# Altium PCB MainBoard.PcbDoc (part 2 of 2)
Units mm, origin at the board's own origin, x right, y up, seen from the top; angles counter-clockwise.
Board outline 48 x 51 mm, 4 copper layers (Component Side, Ground Plane, Power Plane, Solder Side), stack 0.844 mm thick; 73 components, 157 nets, 519 pads, 251 vias.
Unrouted connection lines stored in the file: 2.
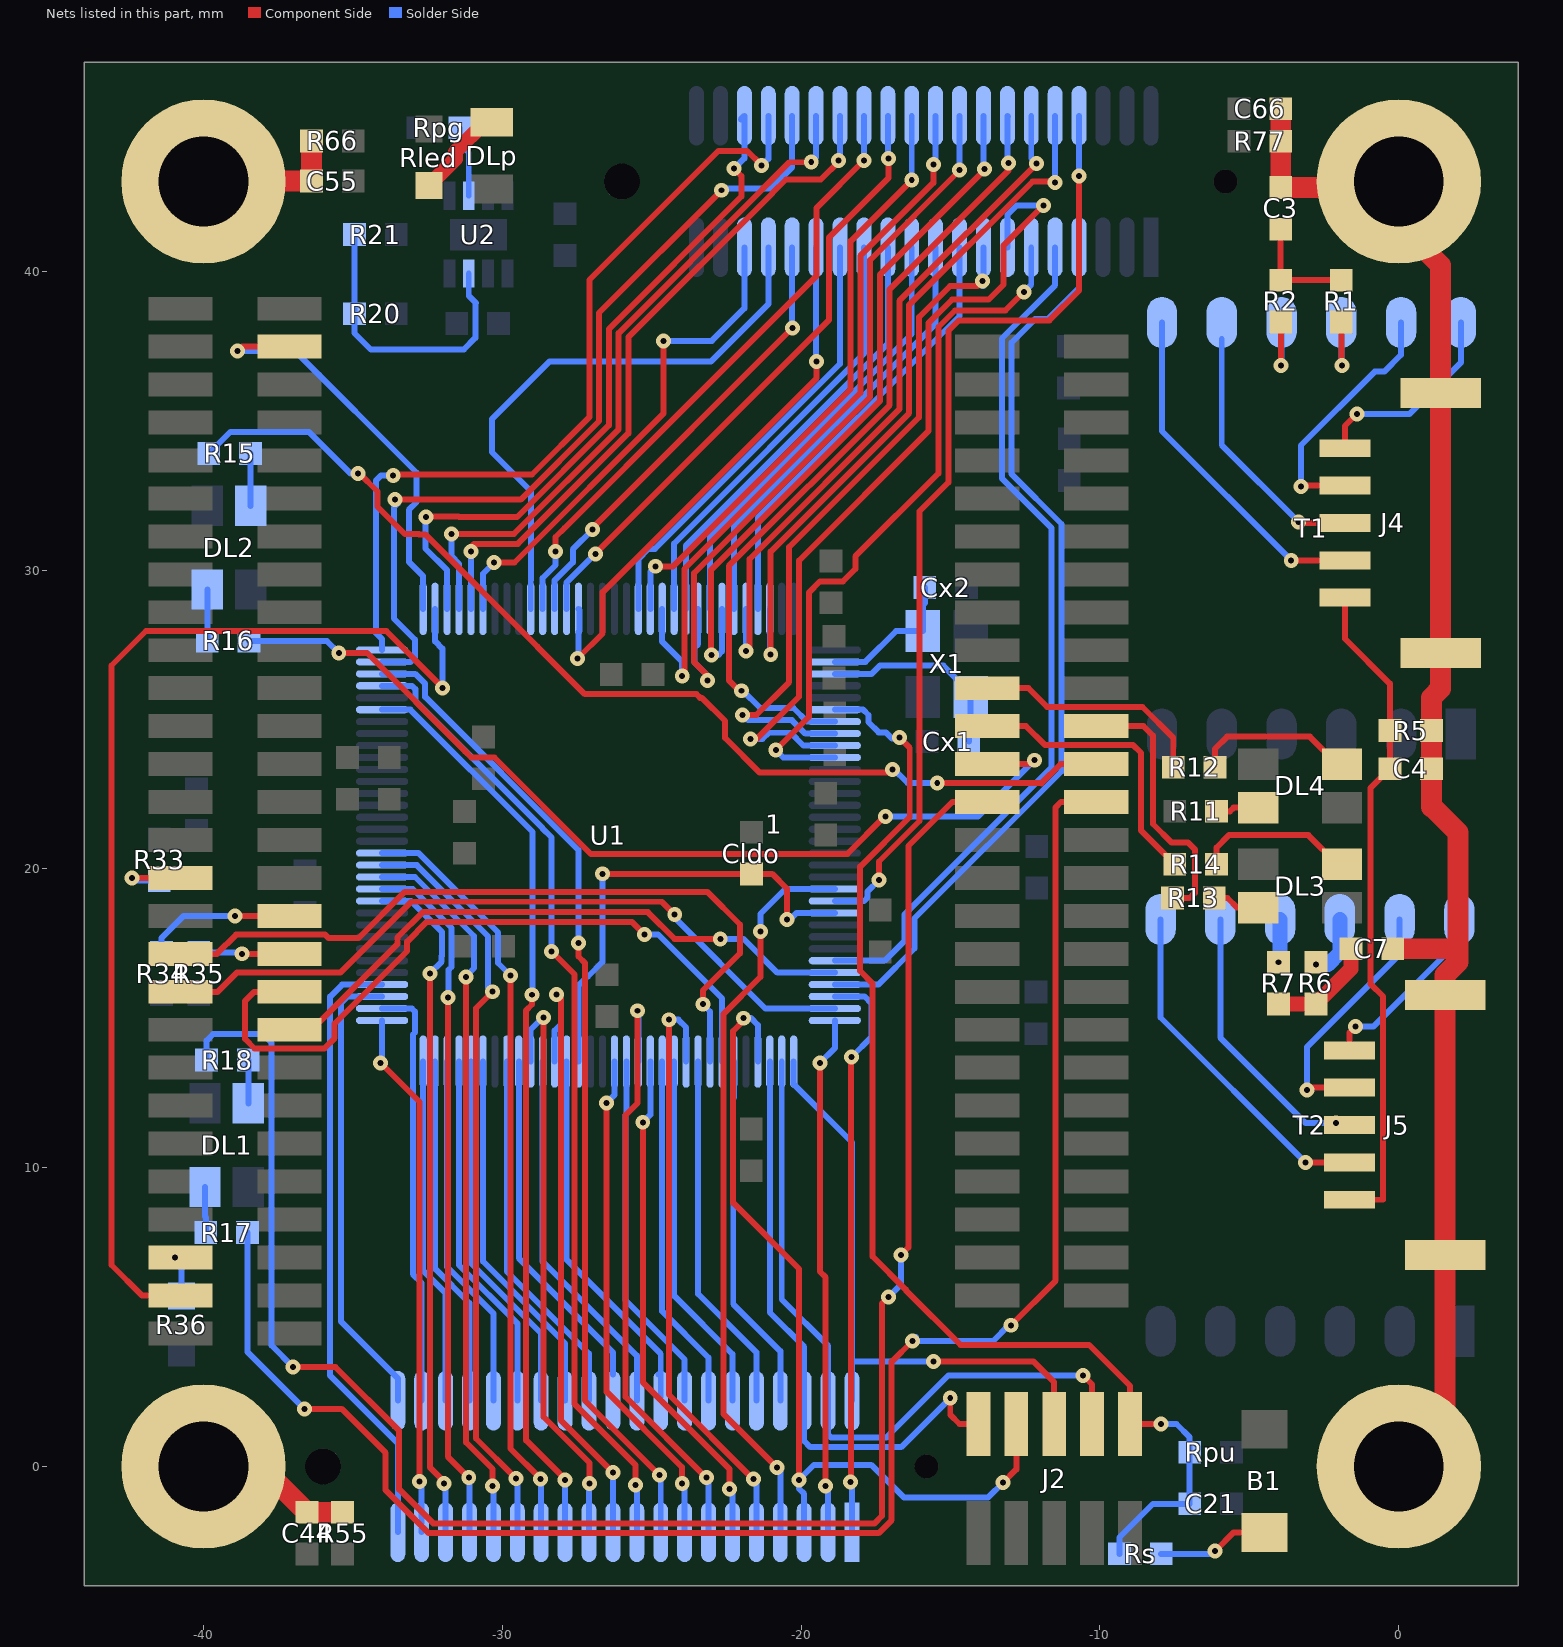
[diagram p4: the nets of this part, all layers, seen from the top]

## Via types
v1: diameter 0.5, hole 0.2, Component Side to Solder Side, 226 vias
v2: diameter 0.5, hole 0.15, Component Side to Solder Side, 25 vias

## Nets (pads, with @x,y where several pads share a name; then routed paths per layer and width w, separated by ;. In a path a pad name is that pad's centre, name@x,y a point inside that pad or via, vN(x,y) a via of type N, cw(c..) or ccw(c..) an arc to the next point about the centre after c; other vN are vias at no path point) (continued)
Net_20: ?.20 R12.2 | length 8.1
  Component Side w0.2: ?.20@-13.775,26.044 -12.394,26.044 -11.767,25.417 -8.577,25.417 -7.549,24.389 R12.2@-7.549,23.55 ; R12.2@-7.549,23.4 R12.2@-7.549,23.55 ; R12.2@-7.399,23.4 R12.2@-7.549,23.55
Net_21: ?.21 R13.2 | length 9
  Component Side w0.2: ?.21@-10.125,24.774 -8.544,24.774 -8.225,24.456 -8.225,21.5 -7.6,20.875 -7.05,20.875 -6.825,20.65 -6.825,19.198 -6.998,19.025 R13.2@-7.574,19.025
Net_22: ?.22 R14.2 | length 9.7
  Component Side w0.2: ?.22@-13.775,24.774 -12.474,24.774 -11.847,24.147 -8.897,24.147 -8.625,23.875 -8.625,21.277 R14.2@-7.499,20.15
Net_23: ?.23 R15.2 | length 35.9
  Component Side w0.2: v1(-34.826,33.235) -34.785,33.235 -34.179,32.629 -34.179,32.121 -33.259,31.201 -32.794,31.201 -32.79,31.196 -32.584,31.196 -28.829,27.441 -28.829,27.435 -27.237,25.844 -23.503,25.844 -23.382,25.722 -23.322,25.722 -22.546,24.946 -22.546,24.377 -21.387,23.218 -17.056,23.218 v1(-16.945,23.329) ; v1(-15.446,22.872) -11.974,22.872 -11.964,22.861 -11.321,23.504 ?.23@-10.125,23.504
  Solder Side w0.2: R15.2@-39.824,33.9 -39.099,34.625 -36.475,34.625 -35.075,33.225 -35.065,33.235 v1(-34.826,33.235) ; v1(-16.945,23.329) -16.919,23.355 -16.437,22.872 v1(-15.446,22.872)
Net_24: ?.24 R16.2 | length 32.4
  Component Side w0.2: v1(-35.475,27.225) -34.531,27.225 -31.243,23.937 -31.243,23.934 -31.033,23.724 -30.264,23.724 -27.038,20.498 -18.455,20.498 -17.199,21.754 v1(-17.173,21.754) ; ?.24@-14.275,23.5 -14.25,23.475 ?.24@-14.091,23.634 ; ?.24@-13.775,23.504 -12.325,23.504 v1(-12.195,23.634)
  Solder Side w0.2: R16.2@-38.477,27.625 -35.875,27.625 v1(-35.475,27.225) ; v1(-17.173,21.754) -14.075,21.754 v1(-12.195,23.634)
Net_25: ?.25 R17.2 | length 58.3
  Component Side w0.2: v1(-36.625,1.925) -35.377,1.925 -33.909,0.457 -33.909,-0.791 -32.468,-2.232 -17.407,-2.232 -16.97,-1.795 -16.97,3.505 v1(-16.275,4.2) ; v1(-12.979,4.724) -11.484,6.22 -11.484,22.059 -11.309,22.234 ?.25@-10.125,22.234
  Solder Side w0.2: R17.2@-38.527,7.825 -38.527,3.826 v1(-36.625,1.925) ; v1@-16.15,4.325 v1(-16.275,4.2) -13.574,4.2 -13.05,4.724 v1(-12.979,4.724)
Net_26: ?.26 R18.2 | length 63.3
  Component Side w0.2: v1(-37,3.326) -35.584,3.326 -33.452,1.194 -33.452,-0.766 -32.313,-1.905 -17.542,-1.905 -17.297,-1.66 -17.297,5.455 v1(-17.075,5.677) ; v1(-16.665,7.073) -16.411,7.327 -16.411,20.764 -14.941,22.234 ?.26@-13.775,22.234
  Solder Side w0.2: R18.2@-39.899,13.6 -39.899,14.251 -39.685,14.465 -38.015,14.465 -37.725,14.175 -37.725,4.051 v1(-37,3.326) ; v1(-17.075,5.677) -16.665,6.087 v1(-16.665,7.073)
Net_103: ?.103 U1.33 | length 14.3
  Component Side w0.2: v1(-38.865,37.325) -38.715,37.475 ?.103@-37.125,37.475
  Solder Side w0.2: v1(-38.865,37.325) -36.935,37.325 -32.875,33.265 -32.875,32.268 -33.129,32.015 -33.129,30.275 -32.65,29.796 U1.33@-32.65,28.7
Net_132: ?.132 R33.2 | length 2.6
  Component Side w0.2: v1(-42.396,19.697) -42.394,19.695 ?.132@-40.775,19.695
  Solder Side w0.2: v1(-42.396,19.697) -42.307,19.608 R33.2@-41.481,19.608
Net_133: ?.133 R34.2 | length 5.1
  Component Side w0.2: v1(-38.941,18.427) -38.939,18.425 ?.133@-37.125,18.425
  Solder Side w0.2: R34.2@-41.405,17.195 -41.405,17.69 -40.668,18.427 v1(-38.941,18.427)
Net_135: ?.135 R35.2 | length 3.1
  Component Side w0.2: v1(-38.713,17.157) -38.711,17.155 ?.135@-37.125,17.155
  Solder Side w0.2: R35.2@-40.16,17.195 -38.751,17.195 v1(-38.713,17.157)
Net_136: ?.136 U1.104 | length 25.3
  Component Side w0.2: ?.136@-40.775,17.155 -39.553,17.155 -38.91,17.798 -35.932,17.798 -35.811,17.677 -34.814,17.677 -33.264,19.227 -23.139,19.227 -22.047,18.136 -22.047,17.17 -23.292,15.926 v1(-23.292,15.469)
  Solder Side w0.2: v1(-23.292,15.469) -23.05,15.227 U1.104@-23.05,13.55
Net_137: ?.137 U1.103 | length 24.4
  Component Side w0.2: ?.137@-37.125,15.885 -38.308,15.885 -38.611,15.582 -38.611,14.305 -38.294,13.988 -35.956,13.988 -35.611,14.333 -35.611,14.823 -33.185,17.249 -33.185,17.565 -32.527,18.223 -25.665,18.223 v1(-25.248,17.805)
  Solder Side w0.2: v1(-25.248,17.805) -24.79,17.805 -22.65,15.665 U1.103@-22.65,13.55
Net_138: ?.138 U1.95 | length 24.7
  Component Side w0.2: ?.138@-40.775,15.885 -39.527,15.885 -38.884,16.528 -35.422,16.528 -33.052,18.898 -24.664,18.898 v1(-24.232,18.466)
  Solder Side w0.2: v1(-24.232,18.466) -24.232,18.359 -21.198,15.325 U1.95@-18.875,15.325
Net_139: ?.139 U1.92 | length 20.8
  Component Side w0.2: ?.139@-37.125,14.615 -36.378,14.615 -33.512,17.48 -33.512,17.7 -32.663,18.55 -25.134,18.55 -24.237,17.653 v1(-22.708,17.653)
  Solder Side w0.2: v1(-22.708,17.653) -21.926,17.653 -20.798,16.525 U1.92@-18.875,16.525
Net_152: ?.152 R36.1 | length 1.6
  Component Side w0.2: v1(-40.96,6.995) ?.152@-40.775,6.995
  Solder Side w0.2: v1(-40.96,6.995) -40.742,6.776 R36.1@-40.742,5.7
Net_154: ?.154 U1.34 | length 37.9
  Component Side w0.2: ?.154@-40.775,5.725 -42.063,5.725 -43.081,6.743 -43.081,26.805 -41.928,27.958 -33.883,27.958 -32.007,26.082 v1(-32.007,26.047)
  Solder Side w0.2: U1.34@-32.25,28.7 -32.25,27.61 -32.007,27.367 v1(-32.007,26.047)
NetB1_2: B1.2 Rs.1 | length 3.8
  Component Side w0.2: v1@-6.091,-2.845 v1(-6.15,-2.833) -5.525,-2.208 B1.2@-4.496,-2.208
  Solder Side w0.2: Rs.1@-7.952,-2.925 -6.242,-2.925 v1(-6.15,-2.833)
NetC3_1: C3.1 R1.1 R2.1 | length 3.7
  Component Side w0.2: C3.1@-3.951,41.401 R2.1@-3.95,39.698 R2.1@-3.95,39.698 R1.1@-1.925,39.698
NetC4_1: C4.1 J4.4 J5.4 R5.2 | length 22.3
  Component Side w0.2: J4.4@-1.8,29.075 -1.8,27.7 -0.299,26.198 C4.1@-0.299,23.35 -0.95,22.698 -0.95,16.15 -0.525,15.725 -0.525,8.925 J5.4@-1.648,8.925
NetC7_1: C7.1 R6.1 R7.1 | length 3.6
  Component Side w0.5: R7.1@-4.025,15.477 R6.1@-2.775,15.477 -1.599,16.653 C7.1@-1.599,17.325
NetCldo_1: Cldo.1 U1.87 U1.115 | length 15.7
  Component Side w0.2: v1(-26.648,19.834) -20.97,19.834 -20.474,19.339 v1(-20.474,18.301)
  Solder Side w0.2: U1.115@-27.45,13.55 -27.45,16.103 -27.156,16.397 -27.135,16.397 -26.648,16.884 v1(-26.648,19.834) ; v1(-20.474,18.301) -20.374,18.301 -20.149,18.526 -20.148,18.525 U1.87@-18.875,18.525
NetCx1_1: Cx1.1 U1.67 X1.1 | length 6.7
  Solder Side w0.2: U1.67@-18.875,26.525 -17.64,26.525 -17.368,26.797 -15.242,26.797 -14.326,25.881 X1.1@-14.326,25.756 -14.326,24.892 -14.389,24.828 Cx1.1@-14.389,24.257
NetCx2_1: Cx2.1 U1.66 X1.3 | length 4.9
  Solder Side w0.2: U1.66@-18.875,26.925 -17.855,26.925 -16.825,27.956 X1.3@-15.926,27.956 -15.926,28.829 -15.862,28.892 Cx2.1@-15.862,29.413
NetDL1_2: DL1.2 R17.1 | length 1.5
  Solder Side w0.2: DL1.2@-39.95,9.351 -39.95,8.361 -39.924,8.335 R17.1@-39.924,7.825
NetDL1_4: DL1.4 R18.1 | length 1.4
  Solder Side w0.2: R18.1@-38.502,13.6 -38.502,13.06 -38.5,13.058 DL1.4@-38.5,12.151
NetDL2_2: DL2.2 R15.1 | length 1.8
  Solder Side w0.2: R15.1@-38.427,33.9 -38.427,33.519 -38.425,33.517 DL2.2@-38.425,32.15
NetDL2_4: DL2.4 R16.1 | length 1.7
  Solder Side w0.2: DL2.4@-39.875,29.35 -39.875,28.675 -39.874,28.674 R16.1@-39.874,27.625
NetDL3_2: DL3.2 R13.1 | length 1.6
  Component Side w0.2: R13.1@-6.177,19.025 -5.732,19.025 -5.407,18.7 DL3.2@-4.7,18.7
NetDL3_4: DL3.4 R14.1 | length 5.3
  Component Side w0.2: R14.1@-6.102,20.15 -6.101,20.711 -5.687,21.125 -3.025,21.125 -2.05,20.15 DL3.4@-1.9,20.15
NetDL4_2: DL4.2 R11.1 | length 1.6
  Component Side w0.2: R11.1@-6.102,21.925 -5.649,21.925 -5.524,22.05 DL4.2@-4.7,22.05 DL4.2@-4.825,21.925
NetDL4_4: DL4.4 R12.1 | length 5.4
  Component Side w0.2: R12.1@-6.152,23.4 -6.152,24.017 -5.743,24.425 -2.975,24.425 -2.05,23.5 DL4.4@-1.9,23.5
NetDLp_A: DLp.A Rled.1 | length 3.1
  Component Side w0.5: Rled.1@-32.461,42.865 -31.572,43.754 -31.572,43.993 -30.582,44.984 DLp.A@-30.353,44.984
NetJ4_0: J4.0 T1.12 | length 6.9
  Component Side w0.2: J4.0@-1.8,34.075 -1.8,34.825 v1(-1.4,35.225)
  Solder Side w0.2: v1(-1.4,35.225) 0.361,35.225 2.075,36.939 T1.12@2.075,38.289
NetJ4_1: J4.1 T1.11 | length 8.6
  Component Side w0.2: v1(-3.275,32.8) -3.25,32.825 J4.1@-1.8,32.825 J4.1@-1.825,32.8
  Solder Side w0.2: v1(-3.275,32.8) -3.275,34.168 -0.804,36.639 -0.486,36.639 0.075,37.199 T1.11@0.075,38.289
NetJ4_2: J4.2 T1.8 | length 8.7
  Component Side w0.2: v1(-3.356,31.61) -3.321,31.575 J4.2@-1.8,31.575
  Solder Side w0.2: T1.8@-5.925,37.725 -5.925,34.179 v1(-3.356,31.61)
NetJ4_3: J4.3 T1.7 | length 11.6
  Component Side w0.2: v1(-3.6,30.325) J4.3@-1.8,30.325
  Solder Side w0.2: T1.7@-7.925,38.289 -7.925,34.65 v1(-3.6,30.325)
NetJ5_0: J5.0 T2.12 | length 6.3
  Component Side w0.2: J5.0@-1.648,13.925 -1.648,14.521 v1(-1.451,14.719)
  Solder Side w0.2: v1(-1.451,14.719) -0.854,14.719 2.027,17.6 T2.12@2.027,18.305
NetJ5_1: J5.1 T2.11 | length 8.4
  Component Side w0.2: v1(-3.075,12.6) -3,12.675 J5.1@-1.648,12.675
  Solder Side w0.2: v1(-3.075,12.6) -3.075,14.034 0.027,17.136 T2.11@0.027,18.305
NetJ5_2: J5.2 T2.8 | length 9.5
  Component Side w0.2: v1(-2.1,11.5) -1.723,11.5 J5.2@-1.648,11.425
  Solder Side w0.2: T2.8@-5.973,18.305 -5.973,14.348 -3.125,11.5 v1(-2.1,11.5)
NetJ5_3: J5.3 T2.7 | length 11.6
  Component Side w0.2: v1(-3.125,10.175) J5.3@-1.648,10.175
  Solder Side w0.2: T2.7@-7.973,18.305 -7.973,15.023 v1(-3.125,10.175)
NetR1_2: R1.2 T1.10 | length 2.9
  Component Side w0.2: R1.2@-1.925,38.301 -1.925,36.859 v1(-1.908,36.842)
  Solder Side w0.2: T1.10@-1.925,38.289 -1.925,36.859 v1(-1.908,36.842)
NetR2_2: R2.2 T1.9 | length 2.9
  Component Side w0.2: R2.2@-3.95,38.301 -3.95,36.852 v1(-3.94,36.842)
  Solder Side w0.2: v1(-3.94,36.842) -3.925,36.857 T1.9@-3.925,38.289
NetR6_2: R6.2 T2.10 | length 2.1
  Solder Side w0.5: v1(-2.775,16.8) -2.367,16.8 -1.973,17.194 T2.10@-1.973,18.305
NetR7_2: R7.2 T2.9 | length 1.4
  Solder Side w0.5: v1@-3.973,16.925 T2.9@-3.973,18.305
  other v1: -4.025,16.873
NetR20_1: R20.1 R21.2 U2.7 | length 10
  Solder Side w0.2: R21.2@-34.949,41.225 -34.949,37.929 -34.4,37.381 -31.29,37.381 -30.902,37.769 -30.902,38.938 ; U2.7@-31.125,39.925 -31.125,39.175 -30.889,38.938
NetRpg_1: Rpg.1 U2.2 | length 2.4
  Solder Side w0.2: Rpg.1@-31.427,44.8 -31.426,44.277 -31.125,43.975 U2.2@-31.125,42.525
PA2: 1.63 U1.35 | length 23.4
  Component Side w0.2: v1(-32.55,31.775) -32.541,31.784 -31.46,31.784 -31.451,31.775 -29.507,31.775 -26.438,34.844 -26.438,38.062 -21.999,42.501 -21.999,43.187 v1(-22.245,43.433)
  Solder Side w0.2: v1(-32.55,31.775) -32.578,31.747 -32.578,30.721 -31.85,29.992 U1.35@-31.85,28.7 ; v1(-22.245,43.433) -21.9,43.779 1.63@-21.9,45.2 1.63@-22.019,45.081
PA3: 1.66 U1.36 | length 23.3
  Component Side w0.2: v1(-31.7,31.205) -31.29,31.205 ; -31.289,31.205 -30.81,31.205 ; -30.809,31.205 -29.615,31.205 -26.111,34.708 -26.111,37.927 -21.288,42.75 -21.288,42.755 -20.397,43.647 -19.665,43.647 v1(-19.663,43.649)
  Solder Side w0.2: v1(-31.7,31.205) -31.7,30.457 -31.45,30.207 U1.36@-31.45,28.7 ; v1(-19.663,43.649) -19.5,43.812 1.66@-19.5,45.2
PA4: 1.67 U1.37 | length 23.2
  Component Side w0.2: v1@-31.049,30.587 v1(-31.049,30.627) -31.049,30.774 -30.946,30.878 -29.479,30.878 -25.784,34.573 -25.784,37.791 -20.961,42.614 -20.961,42.62 -20.51,43.071 -19.345,43.071 -18.715,43.7 v1(-18.748,43.7)
  Solder Side w0.2: U1.37@-31.05,28.7 v1@-31.05,30.587 ; v1@-31.049,30.599 v1(-31.049,30.627) ; v1(-18.748,43.7) -18.7,43.748 1.67@-18.7,45.2
PA5: 1.58 U1.38 | length 17.1
  Component Side w0.2: v1@-30.33,30.252 v1(-30.274,30.252) -29.594,30.252 -24.613,35.233 v1(-24.613,37.668)
  Solder Side w0.2: U1.38@-30.65,28.7 -30.65,29.875 v1(-30.274,30.252) ; v1(-24.613,37.668) -22.987,37.668 -21.9,38.755 1.58@-21.9,40.8
PB1: 1.2 U1.96 | length 17.4
  Component Side w0.2: v1(-19.375,13.5) -19.375,6.523 -19.18,6.328 v1(-19.18,-0.648)
  Solder Side w0.2: v1(-19.375,13.5) -18.875,14 U1.96@-18.875,14.925 ; v1(-19.18,-0.648) -19.1,-0.728 1.2@-19.1,-2.2
PB2: 1.45 U1.91 | length 29.3
  Solder Side w0.2: U1.91@-18.875,16.925 -17.207,16.925 -16.535,17.597 -16.535,18.476 -11.616,23.394 -11.616,31.403 -13.284,33.071 -13.284,37.748 -11.5,39.532 1.45@-11.5,40.8
PB4: 1.29 U1.121 | length 12.5
  Solder Side w0.2: U1.121@-29.85,13.55 -29.85,6.525 -27.1,3.775 1.29@-27.1,2.2
PB5: 1.30 U1.120 | length 11.8
  Solder Side w0.2: U1.120@-29.45,13.55 -29.45,6.971 -26.3,3.821 1.30@-26.3,3.075
PC0: 1.3 J2.9 U1.100 | length 30
  Component Side w0.2: v1(-21.925,15) -21.925,14.927 -22.277,14.574 -22.277,8.819 -20.074,6.615 v1(-20.074,-0.45) ; v1(-13.241,-0.536) -12.802,-0.096 J2.9@-12.802,1.419
  Solder Side w0.2: v1(-21.925,15) -21.675,15 -21.45,14.775 U1.100@-21.45,13.55 ; 1.3@-19.9,-2.2 -19.9,-0.919 -20.074,-0.745 v1(-20.074,-0.45) -19.57,0.054 -17.656,0.054 -16.566,-1.036 -13.741,-1.036 v1(-13.241,-0.536)
PC1: 1.38 J2.10 U1.99 | length 20.5
  Component Side w0.2: v1(-15.011,2.286) -15.011,1.727 -14.703,1.419 J2.10@-14.072,1.419
  Solder Side w0.2: U1.99@-21.05,13.55 -21.05,5.15 -19.9,4 -19.9,0.85 -19.696,0.646 -16.651,0.646 v1(-15.011,2.286)
PC2: 1.39 J2.7 U1.98 | length 24.3
  Component Side w0.2: v1(-10.566,3.048) -10.262,2.743 J2.7@-10.262,1.419
  Solder Side w0.2: U1.98@-20.65,13.55 -20.65,5.588 -19.1,4.038 -19.1,1.066 -19.007,0.973 -17.143,0.973 -15.068,3.048 v1(-10.566,3.048)
PC3: 1.40 J2.8 U1.97 | length 20.6
  Component Side w0.2: v1(-15.57,3.505) -12.217,3.505 -11.532,2.819 J2.8@-11.532,1.419
  Solder Side w0.2: U1.97@-20.25,13.55 -20.25,12.795 -18.3,10.845 -18.3,3.505 ; 1.40@-18.3,2.2 -18.3,3.505 ; v1(-15.57,3.505) -18.3,3.505
PD0: 1.19 U1.1 | length 17.7
  Component Side w0.2: v1(-34.075,13.5) -32.775,12.2 v1(-32.775,-0.5)
  Solder Side w0.2: v1(-34.075,13.5) -34.025,13.55 U1.1@-34.025,14.925 ; v1(-32.775,-0.5) -32.7,-0.575 1.19@-32.7,-2.2
PD1: 1.22 U1.2 | length 14.3
  Solder Side w0.2: U1.2@-34.025,15.325 -33.029,15.325 -32.923,15.219 -32.923,14.523 -32.997,14.449 -32.997,6.435 -32.7,6.138 1.22@-32.7,2.2
PD2: 1.21 U1.3 | length 15.6
  Solder Side w0.2: U1.3@-34.025,15.725 -35.177,15.725 -35.408,15.494 -35.408,4.858 -33.5,2.95 1.21@-33.5,2.2
PD3: 1.20 U1.4 | length 20.8
  Solder Side w0.2: U1.4@-34.025,16.125 -35.361,16.125 -35.763,15.723 -35.763,3.039 -33.5,0.775 1.20@-33.5,-2.2
PD4: 1.26 U1.125 | length 12.2
  Solder Side w0.2: U1.125@-31.45,13.55 -31.45,6.738 -29.5,4.788 1.26@-29.5,2.2
PD5: 1.25 U1.126 | length 12
  Solder Side w0.2: U1.126@-31.85,13.55 -31.85,6.675 -30.3,5.125 1.25@-30.3,2.2
PD6: 1.24 U1.127 | length 11.8
  Solder Side w0.2: U1.127@-32.25,13.55 -32.25,6.613 -31.1,5.463 1.24@-31.1,2.2
PD7: 1.23 U1.128 | length 11.7
  Solder Side w0.2: U1.128@-32.65,13.55 -32.65,6.55 -31.9,5.8 1.23@-31.9,2.2
PE: C3.2 C4.2 C7.2 C44.2 C55.2 C66.2 J4.5 J4.6 J5.5 J5.6 pad.2 pad.3 pad.4 pad.5 R5.1 R55.1 R66.1 R77.1 | length 64.4
  Component Side w0.7: pad.3@-40,0 -38.07,0 C44.2@-36.535,-1.535 -36.154,-1.535 R55.1@-35.35,-1.535 ; pad.2@-39.985,43.015 C55.2@-36.39,43.015 -36.39,43.396 R66.1@-36.391,44.36 ; -3.951,43.179 C3.2@-3.951,42.798 -0.201,42.798 pad.5@0,43 0,41.6 1.4,40.2 J4.5@1.4,35.925 J4.6@1.4,27.225 1.4,26.028 1.098,25.726 1.098,22.075 ; -3.952,43.18 -3.952,44.731 ; R77.1@-3.952,44.35 -3.952,44.731 ; C66.2@-3.952,45.436 -3.952,44.731 ; C7.2@-0.202,17.325 1.931,17.325 1.981,17.375 ; pad.4@0,0 1.552,1.552 J5.6@1.552,7.075 J5.5@1.552,15.775 1.552,16.451 1.981,16.881 1.981,17.375 ; 1.11,22.09 1.981,21.218 1.981,17.375
PE0: 1.14 U1.15 | length 25.6
  Component Side w0.2: v1@-29.726,16.426 -29.726,0.594 -28.73,-0.401 v1(-28.73,-0.42)
  Solder Side w0.2: U1.15@-34.025,20.525 -32.8,20.525 -30.147,17.872 -30.147,16.847 v1(-29.729,16.428) ; v1(-28.73,-0.42) -28.7,-0.45 1.14@-28.7,-2.2
PE1: 1.15 U1.14 | length 25.3
  Component Side w0.2: v1(-30.331,15.887) -30.883,15.334 -30.883,0.933 v1(-29.55,-0.4)
  Solder Side w0.2: U1.14@-34.025,20.125 -32.863,20.125 -30.474,17.737 -30.474,16.031 v1(-30.331,15.887) ; v1(-29.55,-0.4) -29.5,-0.45 1.15@-29.5,-2.2
PE2: 1.16 U1.13 | length 24.3
  Component Side w0.2: v1(-31.217,16.383) -31.217,0.804 -30.331,-0.082 v1(-30.331,-0.648)
  Solder Side w0.2: U1.13@-34.025,19.725 -32.925,19.725 -30.95,17.75 -30.95,16.675 -31.217,16.408 v1(-31.217,16.383) ; v1(-30.331,-0.648) -30.3,-0.679 1.16@-30.3,-2.2
PE3: 1.17 U1.12 | length 23.4
  Component Side w0.2: v1(-31.824,15.701) -31.824,0.325 v1(-31.124,-0.375)
  Solder Side w0.2: U1.12@-34.025,19.325 -32.999,19.325 -31.701,18.027 -31.701,16.95 -31.704,16.947 -31.704,16.714 -31.795,16.623 -31.795,15.73 v1(-31.824,15.701) ; v1(-31.124,-0.375) -31.1,-0.399 1.17@-31.1,-2.2
PE4: 1.28 U1.123 | length 12.5
  Solder Side w0.2: U1.123@-30.65,13.55 -30.65,6.863 -27.9,4.113 1.28@-27.9,2.2
PE5: 1.27 U1.124 | length 12.3
  Solder Side w0.2: U1.124@-31.05,13.55 -31.05,6.8 -28.7,4.45 1.27@-28.7,2.2
PF0: 1.57 U1.42 | length 19.6
  Solder Side w0.2: U1.42@-29.05,28.7 -29.05,29.664 -29.042,29.673 -29.042,32.642 -30.35,33.95 -30.35,35.05 -28.418,36.982 -23.012,36.982 -21.1,38.895 1.57@-21.1,40.8
PF1: 1.68 U1.43 | length 21
  Component Side w0.2: v1(-28.22,30.619) -28.22,31.105 -27.918,31.407 -23.851,35.474 -19.482,39.843 -19.482,42.123 v1(-17.902,43.703)
  Solder Side w0.2: U1.43@-28.65,28.7 -28.65,29.734 -28.22,30.164 v1(-28.22,30.619) ; v1(-17.902,43.703) -17.9,43.705 1.68@-17.9,45.2
PF2: 1.56 U1.44 | length 15.4
  Component Side w0.2: v1(-26.978,31.356) -26.978,31.417 v1(-20.295,38.1)
  Solder Side w0.2: U1.44@-28.25,28.7 -28.25,29.654 -28.246,29.654 -27.642,30.258 -27.642,30.692 v1(-26.978,31.356) ; 1.56@-20.3,40.8 -20.3,38.095 v1(-20.295,38.1)
PF3: 1.69 U1.45 | length 21
  Component Side w0.2: v1(-26.876,30.543) -26.876,30.561 -19.062,38.375 -19.062,41.136 -17.072,43.126 v1(-17.072,43.776)
  Solder Side w0.2: U1.45@-27.85,28.7 -27.85,29.588 -26.895,30.543 v1(-26.876,30.543) ; 1.69@-17.1,45.2 -17.1,43.804 v1(-17.072,43.776)
PF4: 1.55 U1.46 | length 18.8
  Component Side w0.2: v1(-27.486,27.038) -26.646,27.877 -26.646,29.259 -19.482,36.424 v1(-19.482,36.982)
  Solder Side w0.2: v1(-27.486,27.038) -27.486,27.015 -27.45,27.051 -27.45,27.932 -27.415,27.966 -27.415,28.665 U1.46@-27.45,28.7 ; 1.55@-19.5,40.8 -19.5,37.001 v1(-19.482,36.982)
PG2: 1.54 U1.51 | length 15
  Solder Side w0.2: U1.51@-25.45,28.7 -25.45,29.885 -25.45,30.365 -25.111,30.704 -24.897,30.704 -18.7,36.901 1.54@-18.7,40.8
PG3: 1.70 U1.52 | length 20.5
  Component Side w0.2: v1(-24.871,30.125) -24.282,30.125 -18.347,36.06 -18.347,41.003 v1(-16.3,43.05)
  Solder Side w0.2: U1.52@-25.05,28.7 -25.05,29.946 v1(-24.871,30.125) ; v1(-16.3,43.05) 1.70@-16.3,45.2
PG4: 1.71 U1.53 | length 24.8
  Component Side w0.2: v1(-23.981,26.453) -23.91,26.524 -23.91,30.035 -18.02,35.924 -18.02,40.512 -15.575,42.957 v1(-15.575,43.575)
  Solder Side w0.2: U1.53@-24.65,28.7 -24.65,27.605 -23.981,26.936 v1(-23.981,26.453) ; v1(-15.575,43.575) -15.5,43.65 1.71@-15.5,45.2
PG5: 1.53 U1.54 | length 14.7
  Solder Side w0.2: U1.54@-24.25,28.7 -24.25,30.888 -17.9,37.238 1.53@-17.9,40.8
PG6: 1.52 U1.55 | length 14.9
  Solder Side w0.2: U1.55@-23.85,28.7 -23.85,30.826 -17.1,37.576 1.52@-17.1,40.8
PG7: 1.72 U1.56 | length 25.4
  Component Side w0.2: v1(-23.142,26.301) -23.142,26.477 -23.583,26.917 -23.583,29.899 -17.693,35.789 -17.693,40.376 -14.7,43.369 v1(-14.7,43.388)
  Solder Side w0.2: U1.56@-23.45,28.7 -23.45,27.519 -23.578,27.391 -23.578,26.912 -23.142,26.477 v1(-23.142,26.301) ; v1(-14.7,43.388) 1.72@-14.7,45.2
PH0: 1.10 U1.29 | length 32.4
  Component Side w0.2: v1(-28.349,17.233) -27.581,16.464 -27.581,2.083 -25.549,0.051 v1(-25.549,-0.625)
  Solder Side w0.2: U1.29@-34.025,26.125 -33.025,26.125 -32.913,26.013 -32.913,25.621 -28.663,21.371 -28.663,21.363 -28.349,21.049 v1(-28.349,17.233) ; v1(-25.549,-0.625) -25.5,-0.674 1.10@-25.5,-2.2
PH1: 1.9 U1.30 | length 33.2
  Component Side w0.2: v1(-27.452,17.517) -27.452,17.064 -27.241,16.852 -27.241,2.205 v1(-24.743,-0.293)
  Solder Side w0.2: U1.30@-34.025,26.525 -32.917,26.525 -32.586,26.194 -32.586,25.757 -27.452,20.623 v1(-27.452,17.517) ; v1(-24.743,-0.293) -24.7,-0.335 1.9@-24.7,-2.2
PH2: 1.65 U1.31 | length 28.9
  Component Side w0.2: v1(-33.601,32.361) v1@-33.601,32.354 ; v1@-33.543,32.225 v1@-33.601,32.283 ; v1(-22.66,42.709) -26.765,38.604 -26.765,34.979 -29.391,32.354 v1@-33.601,32.354 ; v1@-33.601,32.283 -33.671,32.354 v1@-33.601,32.354 ; v1@-33.601,32.283 v1@-33.601,32.354
  Solder Side w0.2: U1.31@-34.025,26.925 -33.07,26.925 -32.923,27.072 -32.923,27.672 -33.625,28.374 -33.625,32.1 -33.5,32.225 -33.601,32.325 v1(-33.601,32.361) ; v1(-22.66,42.709) -22.6,42.769 -21.006,42.769 -20.3,43.475 1.65@-20.3,45.2
PH3: 1.64 U1.32 | length 27.9
  Component Side w0.2: v1(-33.653,33.166) -33.622,33.196 -29.01,33.196 -27.092,35.115 -27.092,39.705 -22.767,44.03 -21.812,44.03 v1(-21.321,43.54)
  Solder Side w0.2: U1.32@-34.025,27.325 -34.025,27.684 -34.225,27.884 -34.225,33 -34.059,33.166 v1(-33.653,33.166) ; v1(-21.321,43.54) -21.1,43.761 1.64@-21.1,45.2
PJ0: 1.32 U1.116 | length 12.7
  Solder Side w0.2: U1.116@-27.85,13.55 -27.85,6.92 -24.7,3.77 1.32@-24.7,3.075 ; 1.32@-24.771,3.075 1.32@-24.7,3.075 ; 1.32@-24.7,2.2 1.32@-24.7,3.075
PJ1: 1.11 U1.117 | length 21.2
  Component Side w0.2: v1(-28.194,15.799) -28.046,15.651 -28.046,1.546 v1(-26.3,-0.2)
  Solder Side w0.2: U1.117@-28.25,13.55 -28.25,14.582 -28.046,14.786 -28.046,15.651 v1(-28.194,15.799) ; 1.11@-26.3,-2.2 v1(-26.3,-0.2)
PK4: 1.76 U1.62 | length 24
  Component Side w0.2: -21.019,27.723 -21.019,30.613 -16.385,35.247 -16.385,38.873 -12.254,43.004 -11.549,43.004 v1(-11.509,42.963) ; v1(-21.019,27.18) -21.019,27.723
  Solder Side w0.2: U1.62@-21.05,28.7 -21.05,27.211 v1(-21.019,27.18) ; v1(-11.509,42.963) -11.5,42.973 1.76@-11.5,45.2
PK5: 1.49 U1.61 | length 14.9
  Solder Side w0.2: U1.61@-21.45,28.7 -21.45,31.75 -14.7,38.5 1.49@-14.7,40.8
PK6: 1.75 U1.60 | length 23.7
  Component Side w0.2: v1(-21.842,27.292) -21.766,27.292 -21.725,27.25 -21.725,30.37 -16.712,35.382 -16.712,39.008 v1(-12.122,43.598)
  Solder Side w0.2: v1@-21.85,27.151 U1.60@-21.85,28.7 ; 1.75@-12.3,45.2 -12.3,43.777 v1(-12.122,43.598)
PK7: 1.50 U1.59 | length 14.9
  Solder Side w0.2: U1.59@-22.25,28.7 -22.25,31.488 -15.5,38.238 1.50@-15.5,40.8
PL5: 1.77 U1.86 | length 32
  Component Side w0.2: v1(-17.394,19.626) -17.394,20.243 -16.039,21.598 -16.039,31.967 -15.077,32.929 -15.077,37.999 -14.718,38.358 -11.692,38.358 -10.696,39.354 v1(-10.696,43.192)
  Solder Side w0.2: U1.86@-18.875,18.925 -17.893,18.925 -17.773,19.045 -17.773,19.247 v1(-17.394,19.626) ; v1(-10.696,43.192) -10.7,43.196 1.77@-10.7,45.2 1.77@-10.696,45.196
PL6: 1.1 U1.94 | length 19.3
  Component Side w0.2: v1@-18.333,-0.508 v1@-18.333,13.686
  Solder Side w0.2: U1.94@-18.875,15.725 -17.875,15.725 -17.653,15.503 -17.653,14.366 v1(-18.316,13.703) ; v1(-18.35,-0.525) -18.3,-0.575 1.1@-18.3,-2.2
PL7: 1.44 U1.93 | length 30.5
  Solder Side w0.2: U1.93@-18.875,16.125 -17.418,16.125 -16.208,17.335 -16.208,18.34 -11.289,23.259 -11.289,31.538 -12.957,33.206 -12.957,37.613 -12.173,38.396 -11.758,38.396 -10.7,39.455 1.44@-10.7,40.8
PM4: 1.46 U1.74 | length 23.9
  Component Side w0.2: v1(-20.85,23.975) -19.746,25.079 -19.746,29.244 -19.373,29.616 -18.604,29.616 -18.186,30.034 -18.186,30.455 -15.404,33.237 -15.404,38.134 -14.854,38.685 -13.166,38.685 v1(-12.549,39.302)
  Solder Side w0.2: v1(-20.85,23.975) -20.6,23.725 U1.74@-18.875,23.725 ; v1(-12.549,39.302) -12.3,39.551 1.46@-12.3,40.8
PM5: 1.47 U1.73 | length 28.3
  Component Side w0.2: v1(-21.7,24.35) -21.482,24.35 -20.073,25.759 -20.073,30.314 -15.731,34.656 -15.731,38.27 -14.951,39.05 -13.732,39.05 -13.225,39.557 -13.225,40.867 v1(-11.89,42.201)
  Solder Side w0.2: v1(-21.7,24.35) -21.293,24.35 -21.09,24.554 -20.354,24.554 -19.925,24.125 U1.73@-18.875,24.125 ; 1.47@-13.1,40.8 -13.1,41.881 -12.779,42.201 v1(-11.89,42.201)
PM6: 1.48 U1.72 | length 23.5
  Component Side w0.2: v1(-21.967,25.155) -21.495,25.155 -20.4,26.25 -20.4,30.77 -16.058,35.112 -16.058,38.46 -15.018,39.5 -14.1,39.5 v1(-13.925,39.675)
  Solder Side w0.2: v1(-21.967,25.155) -21.787,24.975 -20.312,24.975 -19.862,24.525 U1.72@-18.875,24.525 ; v1(-13.925,39.675) -13.925,39.5 -13.9,39.5 1.48@-13.9,40.8
PM7: 1.74 U1.71 | length 26.9
  Component Side w0.2: v1(-21.998,25.96) -22.073,25.96 -22.42,26.307 -22.42,30.137 -17.039,35.518 -17.039,39.393 -13.059,43.373 v1(-13.059,43.624)
  Solder Side w0.2: v1(-21.998,25.96) -21.954,25.96 -21.375,25.381 -20.256,25.381 -19.8,24.925 U1.71@-18.875,24.925 ; 1.74@-13.08,45.18 1.74@-13.1,45.2 -13.1,43.665 v1(-13.059,43.624)
PN0: 1.35 U1.107 | length 12.2
  Solder Side w0.2: U1.107@-24.25,13.55 -24.25,5.708 -22.3,3.758 1.35@-22.3,2.2
PN1: 1.34 U1.108 | length 12
  Solder Side w0.2: U1.108@-24.65,13.55 -24.65,5.194 -23.1,3.644 1.34@-23.1,2.2
PN2: 1.6 U1.109 | length 17.1
  Component Side w0.2: v1(-25.301,11.518) -25.301,2.815 -22.406,-0.08 v1(-22.406,-0.75)
  Solder Side w0.2: v1(-25.301,11.518) -25.05,11.77 U1.109@-25.05,13.55 ; v1(-22.406,-0.75) -22.3,-0.856 1.6@-22.3,-2.2
PN3: 1.7 U1.110 | length 20.5
  Component Side w0.2: v1(-25.475,15.25) -25.475,12.163 -25.88,11.758 -25.88,2.33 v1(-23.175,-0.375)
  Solder Side w0.2: v1(-25.475,15.25) -25.45,15.225 U1.110@-25.45,13.55 ; v1(-23.175,-0.375) -23.1,-0.45 1.7@-23.1,-2.2
PN4: 1.33 U1.111 | length 12.2
  Solder Side w0.2: U1.111@-25.85,13.55 -25.85,11.788 -25.88,11.758 -25.88,5.56 -23.9,3.58 1.33@-23.9,2.2
PN5: 1.8 U1.112 | length 16.9
  Component Side w0.2: v1(-26.508,12.167) -26.508,2.496 -23.99,-0.022 -23.99,-0.563 v1(-23.981,-0.572)
  Solder Side w0.2: v1(-26.508,12.167) -26.25,12.425 U1.112@-26.25,13.55 ; v1(-23.981,-0.572) -23.9,-0.653 1.8@-23.9,-2.2
PP0: 1.31 U1.118 | length 12.7
  Solder Side w0.2: U1.118@-28.65,13.55 -28.65,6.857 -25.5,3.707 1.31@-25.5,2.2
PP1: 1.12 U1.119 | length 19.5
  Component Side w0.2: v1(-28.624,15.026) -28.624,1.662 -27.079,0.117 v1(-27.079,-0.572)
  Solder Side w0.2: U1.119@-29.05,13.55 -29.05,14.624 -28.648,15.026 v1(-28.624,15.026) ; 1.12@-27.1,-2.2 -27.1,-0.593 v1(-27.079,-0.572)
PP3: 1.4 U1.85 | length 24.8
  Component Side w0.2: v1(-21.361,17.907) -21.361,16.382 -22.604,15.139 -22.604,1.76 v1(-20.806,-0.039)
  Solder Side w0.2: v1(-21.361,17.907) -21.361,18.491 -20.528,19.325 U1.85@-18.875,19.325 ; v1(-20.806,-0.039) -20.7,-0.144 1.4@-20.7,-2.2
PP4: 1.36 U1.105 | length 12.2
  Solder Side w0.2: U1.105@-23.45,13.55 -23.45,5.772 -21.5,3.822 1.36@-21.5,2.2
PP5: 1.5 U1.106 | length 20.2
  Component Side w0.2: v1(-24.425,14.95) -24.425,2.401 v1(-21.599,-0.425)
  Solder Side w0.2: v1(-24.425,14.95) -24.11,14.95 -23.85,14.69 U1.106@-23.85,13.55 ; v1(-21.599,-0.425) -21.5,-0.524 1.5@-21.5,-2.2
PQ2: 1.18 U1.11 | length 22.9
  Component Side w0.2: v1(-32.425,16.5) -32.425,-0.032 -31.956,-0.501 v1(-31.956,-0.572)
  Solder Side w0.2: U1.11@-34.025,18.925 -33.061,18.925 -32.028,17.892 -32.028,17.085 -32.031,17.083 -32.031,16.894 v1(-32.425,16.5) ; v1(-31.956,-0.572) -31.9,-0.628 1.18@-31.9,-2.2
PQ3: 1.13 U1.27 | length 30.9
  Component Side w0.2: v1@-29.067,15.728 v1(-29.01,15.785) -29.01,15.459 -29.203,15.266 -29.203,0.871 -27.9,-0.432 v1(-27.9,-0.45)
  Solder Side w0.2: U1.27@-34.025,25.325 -33.079,25.325 -28.99,21.236 -28.99,15.805 v1(-29.01,15.785) ; 1.13@-27.9,-2.2 v1(-27.9,-0.45)
PQ4: 1.37 U1.102 | length 12
  Solder Side w0.2: U1.102@-22.25,13.55 -22.25,12.34 -22.273,12.317 -22.273,5.433 -20.7,3.86 1.37@-20.7,2.2
PQ5: 1.51 U1.57 | length 14.9
  Solder Side w0.2: U1.57@-23.05,28.7 -23.05,31.15 -16.3,37.9 1.51@-16.3,40.8
PQ6: 1.73 U1.58 | length 23.7
  Component Side w0.2: v1(-22.999,27.151) -23.025,27.177 -23.025,29.994 -17.366,35.653 -17.366,39.884 -13.871,43.379 v1(-13.871,43.421)
  Solder Side w0.2: v1(-22.999,27.151) -22.776,27.151 -22.65,27.277 U1.58@-22.65,28.7 ; 1.73@-13.9,45.2 -13.9,43.449 v1(-13.871,43.421)
RST: C21.1 J2.6 Rpu.1 Rs.2 U1.70 | length 40.5
  Component Side w0.2: v1(-16.716,24.396) -16.366,24.046 -16.366,21.734 -18.029,20.071 -18.029,16.579 -17.605,16.155 -17.605,7.025 -16.496,5.917 -16.496,5.896 -14.664,4.064 -10.363,4.064 -8.992,2.692 J2.6@-8.992,1.419 v1(-7.954,1.419)
  Solder Side w0.2: U1.70@-18.875,25.325 -17.925,25.325 -17.749,25.149 -17.749,24.906 -17.41,24.567 -17.167,24.567 -16.965,24.365 v1@-16.716,24.365 ; Rs.2@-9.349,-2.925 -9.349,-2.374 -8.225,-1.25 C21.1@-6.999,-1.25 Rpu.1@-6.999,0.475 -6.999,0.979 -7.438,1.419 v1(-7.954,1.419)
pads on no net: 1.90 1.91 1.92 1.93 ?.11 ?.12 ?.13 ?.15 ?.16 ?.17 ?.37 ?.38 ?.39 ?.41 ?.42 ?.43 ?.45 ?.46 ?.47 ?.48 ?.49 ?.50 ?.130 ?.141 ?.142 ?.143 ?.145 ?.146 ?.147 ?.148 ?.149 ?.151 ?.153 J2.4 U1.65 U1.89

## Polygon pours and split planes (outlines as drawn)
5V on Solder Side "Bottom Layer-5v" (solid, pour order 2): -22.7,46.2 -22.7,44.203 -23.625,43.7 -23.625,43.093 -22.7,41.775 -22.7,39.8 -25.775,39.8 -27.525,41.55 -29.55,43.575 -29.55,46.2
GND on Ground Plane (split plane): 3.49,-3.49 -43.49,-3.49 -43.49,46.49 3.49,46.49
3V3 on Power Plane (split plane): 3.49,-3.49 -43.49,-3.49 -43.49,46.49 3.49,46.49

## Other copper
Solder Side:
  region net 3V3: -31.575,40.4 -31.575,39.05 -31.15,38.625 -31.15,37.87 -31.375,37.706 -33.556,37.706 -33.937,38.188 -33.937,38.963 -32.5,40.4
  region net 5V: -30.675,42.05 -28.775,42.05 -28.275,41.55 -27.525,41.55 -27.275,41.8 -27.275,43.925 -29.55,46.2 -30.475,46.2 -30.475,43.2 -30.675,43
  region net GND: -29.85,41.75 -29,40.9 -27.525,40.9 -27.3,40.675 -27.3,38.75 -27.425,38.75 -28.375,37.8 -28.45,37.875 -30.5,37.875 -30.5,38.75 -30.675,39.45 -30.675,40.4 -31,40.7 -33.025,40.7 -33.2,40.875 -33.225,40.85 -33.925,40.85 -33.925,41.6 -31.9,41.6 -31.75,41.75

## Silkscreen, mask and mechanical layers (free items; w line width, h text height)
Top Overlay:
  lines w0.254: -7.925,25.275 -7.5,24.85 ; -7.5,31.325 -7.5,24.85 ; -7.075,25.275 -7.5,24.85 ; -0.1,18.2 -0.075,18.2 ; -7.5,24.85 -7.5,24.85 ; -7.5,24.85 -7.5,24.85
  text "B.Kaczor / EthCt 1.0  ►001◄" at -35.325,1.107 h1.52
Mechanical 1:
  the board outline again, w1.2